# EAGLE board Stator_PCB_ver_1.2b (EAGLE 7.4.0)
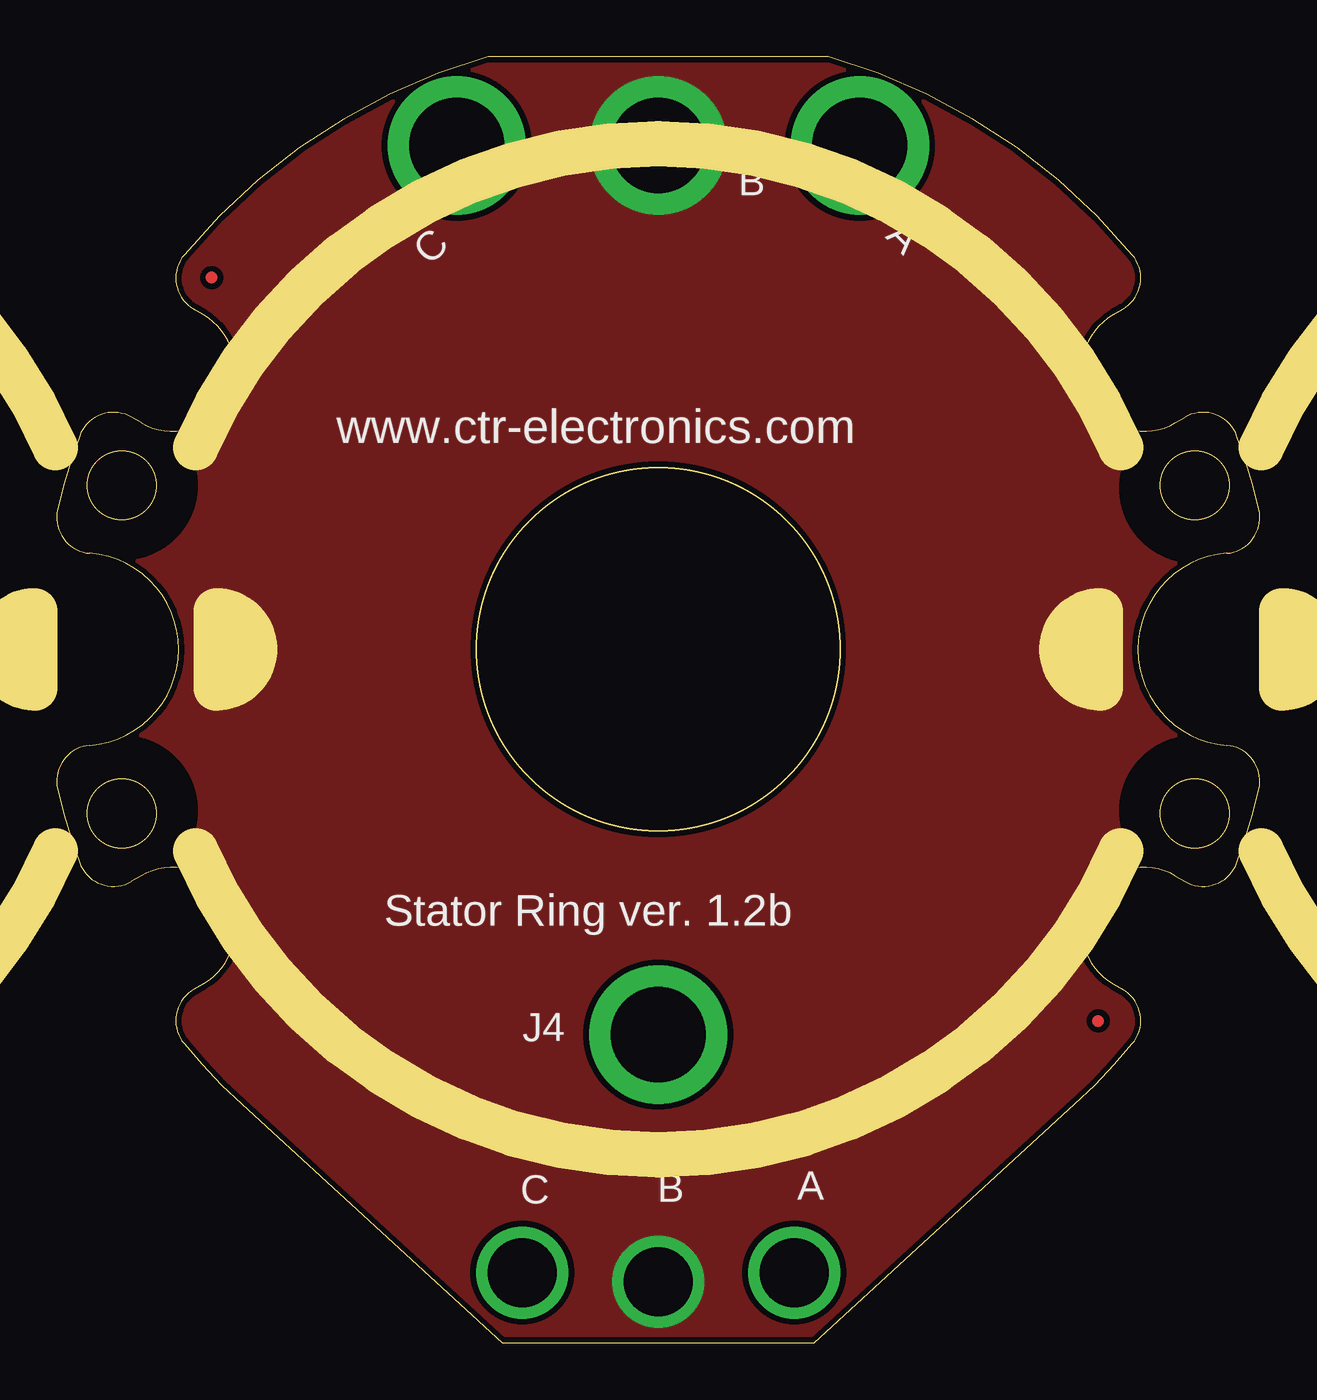
[diagram p0: board, top side]
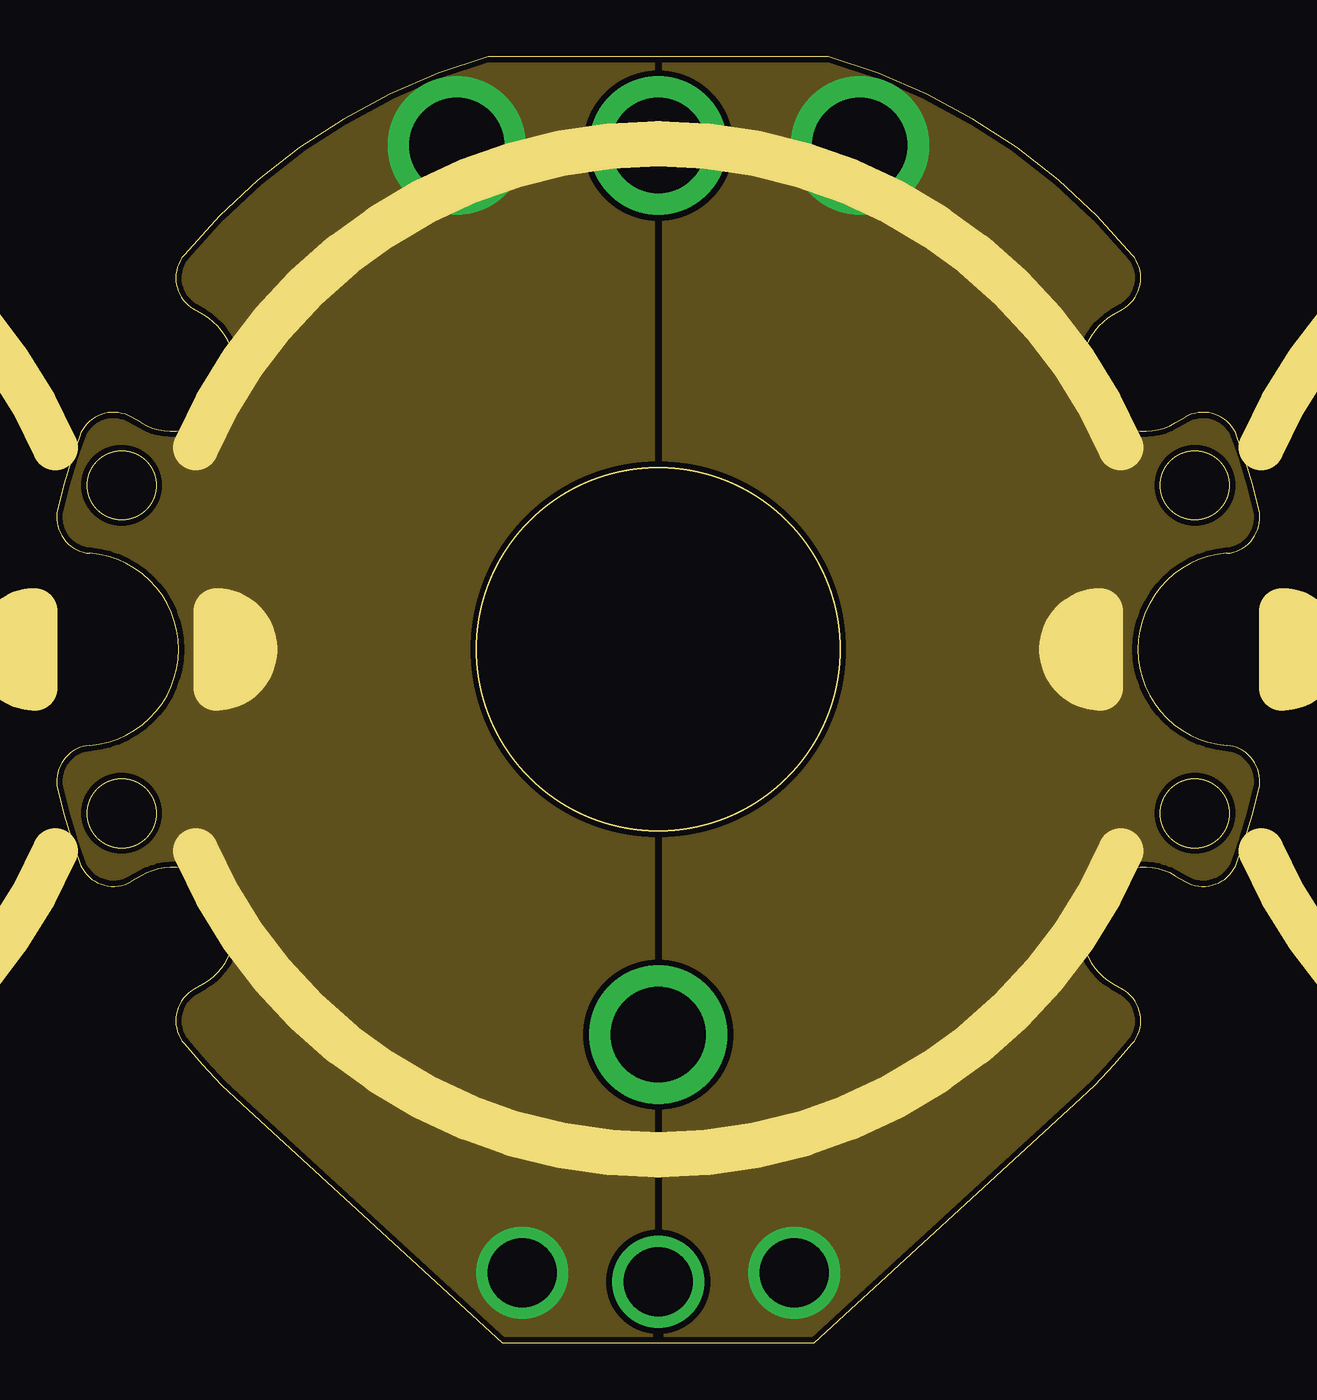
[diagram p1: board, inner layer Route2]
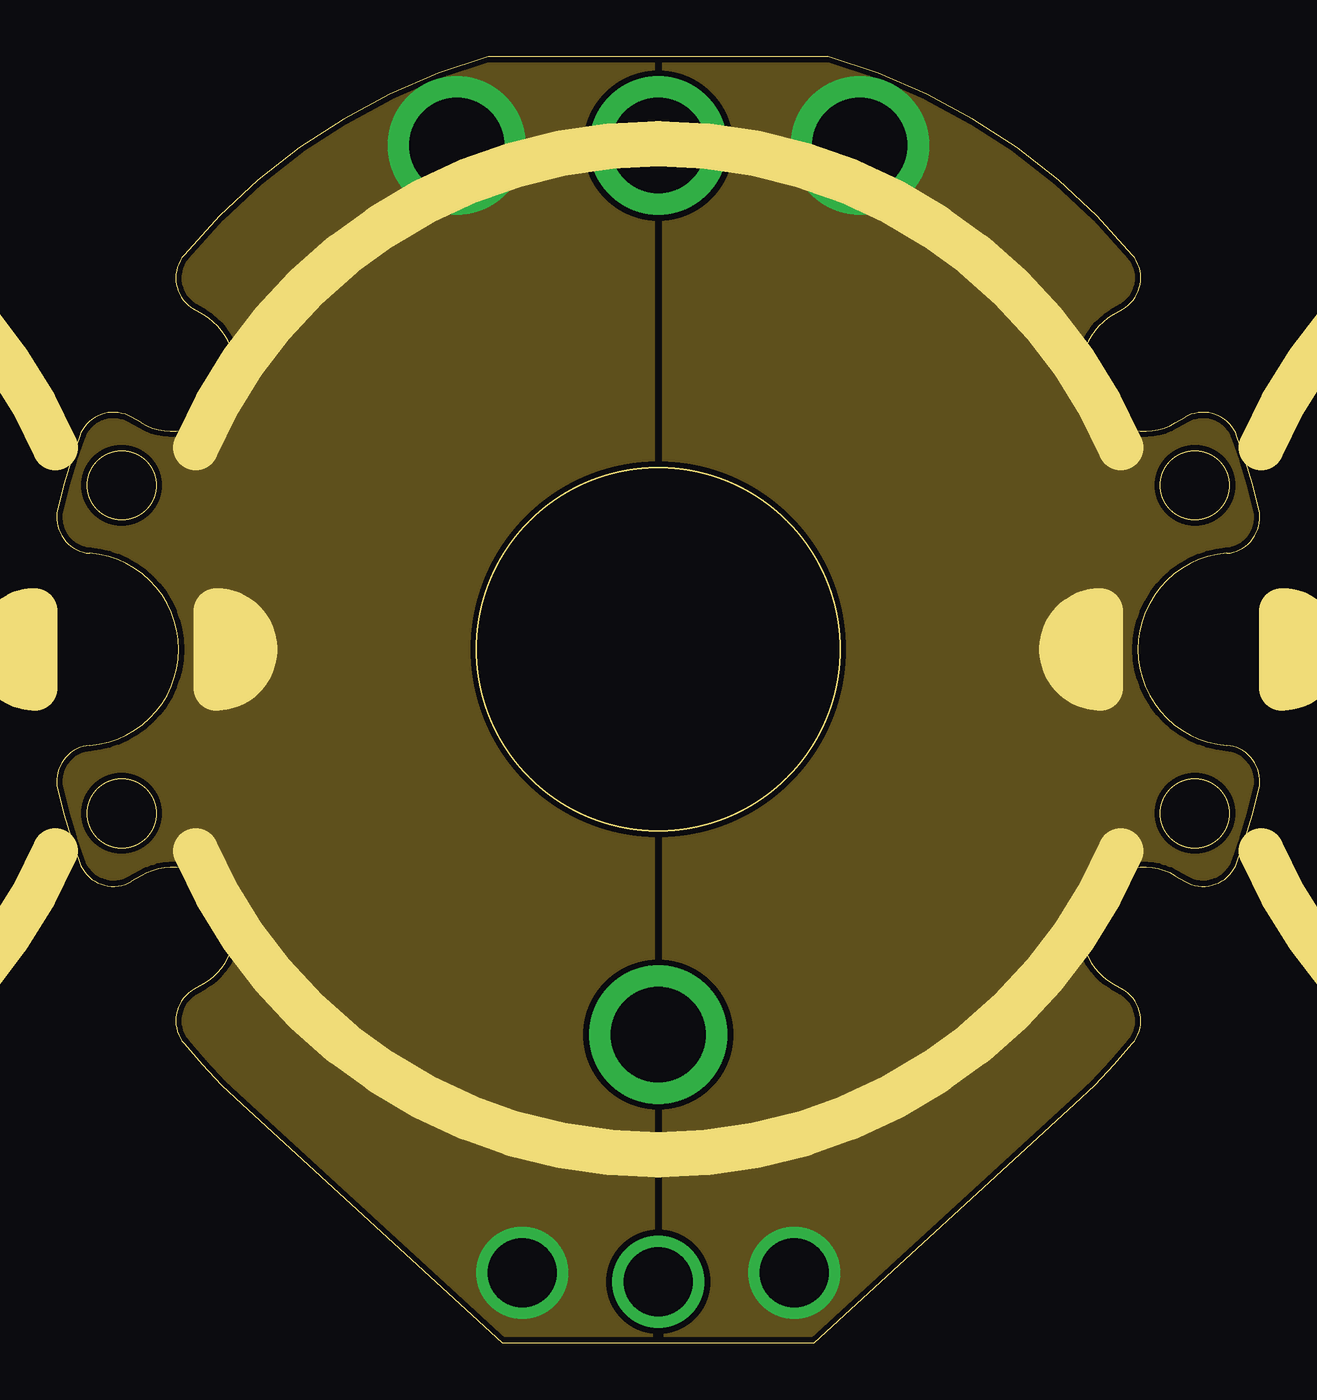
[diagram p2: board, inner layer Route3]
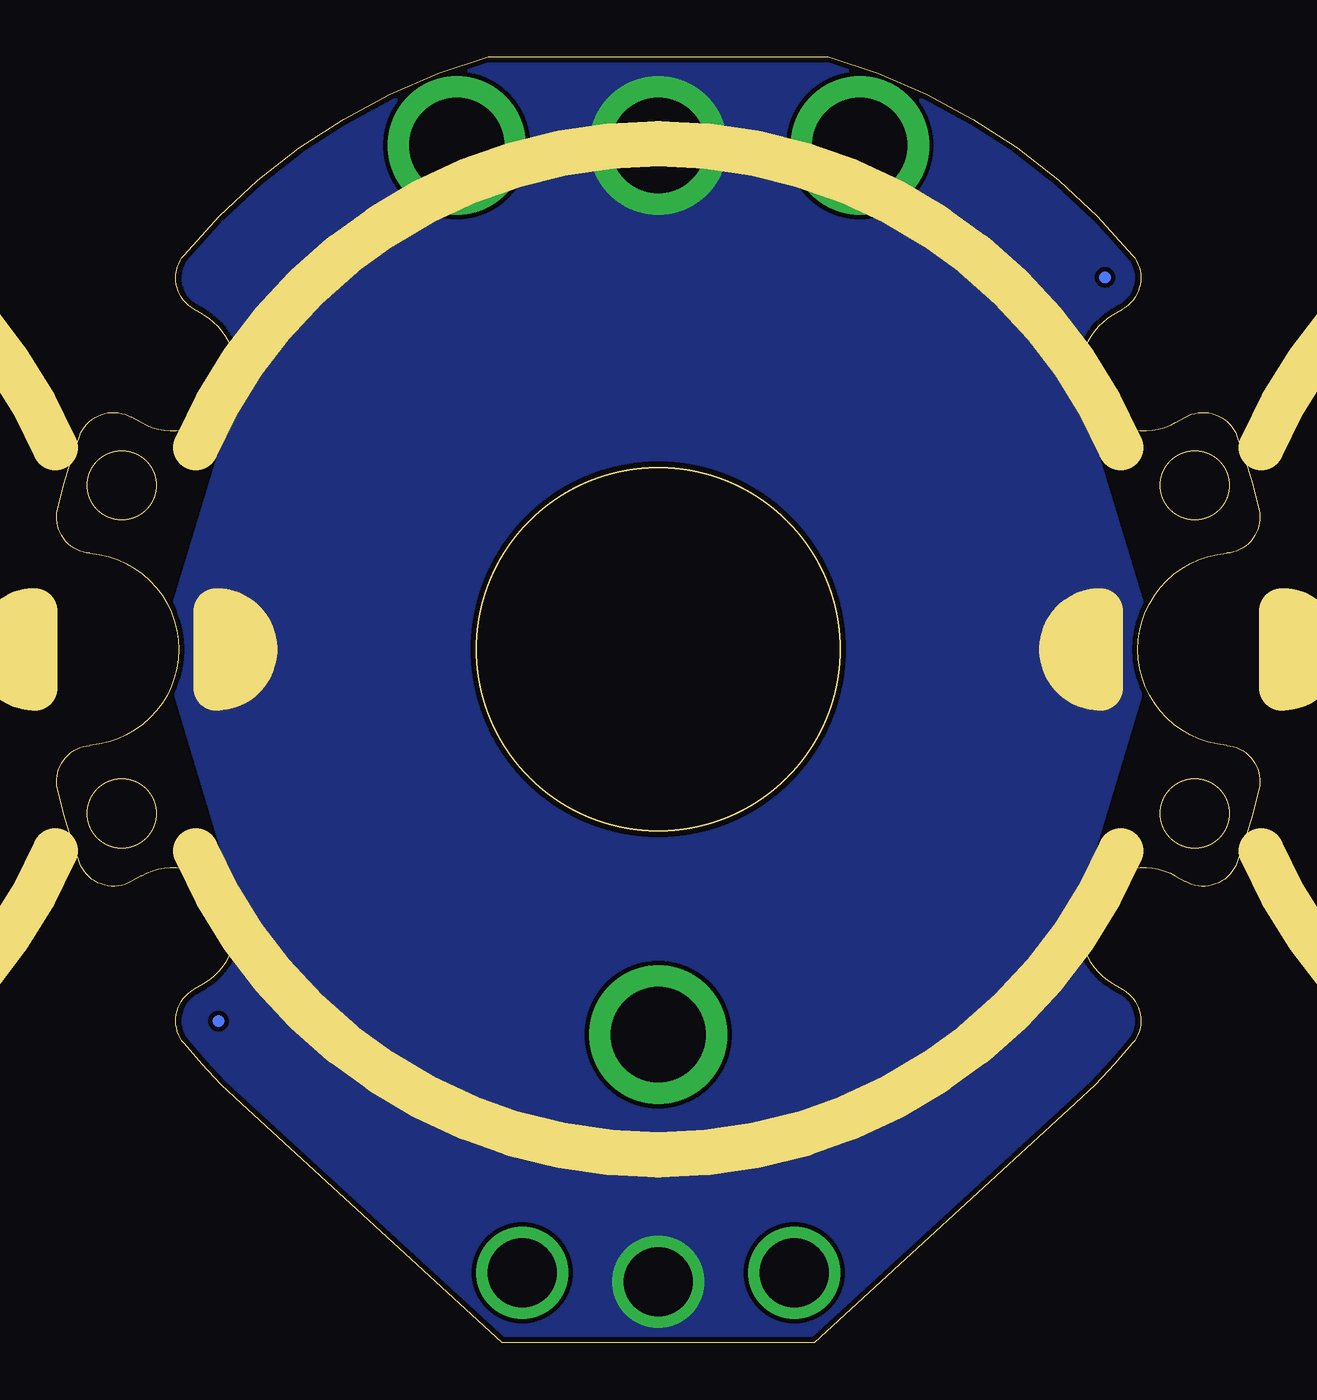
[diagram p3: board, bottom side, seen from below]

Size 53.06 x 56.74 mm. Coordinates in mm from the lower left corner, seen from the top.
Outline: 34.03,56.74 19.03,56.74 arc34 5.62,47.99 arc100 6.04,45.6 6.47,45.35 arc-180 3.72,40.59 3.29,40.83 arc100 1.01,40.01 arc7 0.04,36.77 arc99 1.46,34.83 arc-171 1.46,26.36 arc99 0.04,24.41 arc7 1.01,21.18 arc100 3.29,20.35 3.72,20.6 arc-180 6.47,15.84 6.04,15.59 arc100 5.62,13.2 arc8 8.15,10.54 19.66,0 33.41,0 44.91,10.54 arc8 47.44,13.2 arc100 47.02,15.59 46.59,15.84 arc-180 49.34,20.6 49.77,20.35 arc100 52.05,21.18 arc7 53.02,24.41 arc99 51.6,26.36 arc-171 51.6,34.83 arc99 53.02,36.77 arc7 52.05,40.01 arc100 49.77,40.83 49.34,40.59 arc-180 46.59,45.35 47.02,45.6 arc100 47.44,47.99 arc34 34.03,56.74
Outline: circle at 26.53,30.59 radius 8
Outline: circle at 50.2,37.83 radius 1.52
Outline: circle at 50.2,23.36 radius 1.52
Outline: circle at 2.86,23.36 radius 1.52
Outline: circle at 2.86,37.83 radius 1.52
Outline: circle at 26.53,30.59 radius 8.03
Copper layers (1+2*3+16): Top 0.07mm / dielectric 6mil / Route2 0.07111875mm / dielectric 0.99821875mm / Route3 0.035mm / dielectric 6mil / Bottom 0.035mm
Design rules "default *": minimum track width 7mil, minimum drill 8mil, track to track 0.1968mm, track to pad 0.1968mm, pad to pad 0.1968mm, via to via 0.1968mm, smd to smd 0.1968mm, copper to edge 10mil, drill to drill 8mil, minimum pad ring 5mil, minimum via ring 5mil, stop-mask expansion 2mil, vias tented up to drill 20mil, thermal gap 10mil
tRestrict: area -0.1,34.8 to 6,40.9; area -0.1,20.4 to 6,26.5; area 47.1,34.7 to 53.2,40.8; area 47.1,20.4 to 53.2,26.5
bRestrict: area -0.1,34.8 to 6,40.9; area -0.1,20.4 to 6,26.5; area 47.1,20.4 to 53.2,26.5; area 47.1,34.7 to 53.2,40.8; 4 lines
Milling: 24 lines

## Footprints (pad centres in the part's own frame; a part is rotated, then mirrored left to right if it is on the bottom)
4883 = drill 4.2 pad 6.1: P$1 0,0

## Placement (x,y rotation side)
A  48834883  [4883]  35.42,52.82 65 top
B  48834883  [4883]  26.53,52.82 90 top
C  48834883  [4883]  17.64,52.82 110 top
J4  48834883  [4883]  26.53,13.59 0 top
U$1  [20_MIL_FID]  45.93,14.19 0 top
U$2  [20_MIL_FID]  6.83,46.99 0 top

## Library data of the parts
A B C J4 = KEYSTONE
U$1 U$2 = fiducials

## Nets
A: A.P$1
B: B.P$1
C: C.P$1
NC: J4.P$1

## Tracks (layer width: path | path; a pad name or v marks a point on that pad's centre or on a via)
A  (via drill 3.05 pad 4)
  other vias: 32.53,3.09
  pour Route2 (isolate 0.254, no thermals): 26.78,56.91 53.63,56.91 53.63,-0.14 26.78,-0.14
  pour Route3 (isolate 0.254, no thermals): 26.78,56.91 53.63,56.91 53.63,-0.14 26.78,-0.14
B  (via drill 3.05 pad 4)
  other vias: 26.53,2.69
  pour Top (isolate 0.254, no thermals): 0.22,56.91 53.63,56.91 53.63,-0.14 0.22,-0.14
  pour Bottom (no thermals): 0.22,56.91 53.63,56.91 53.63,-0.14 0.22,-0.14
C  (via drill 3.05 pad 4)
  other vias: 20.53,3.09
  pour Route2 (isolate 0.254, no thermals): 0.22,56.91 26.28,56.91 26.28,-0.14 0.22,-0.14
  pour Route3 (isolate 0.254, no thermals): 0.22,56.91 26.28,56.91 26.28,-0.14 0.22,-0.14

## Text on the board
tPlace: www.ctr-electronics.com | Stator Ring ver. 1.2b
tNames: C | B | A
Panel: ALL DIMENSIONS ARE IN MILS | V-SCORE | ROUTED AREA | HOLES